# Allegro board AAP-PCB-SET6.brd
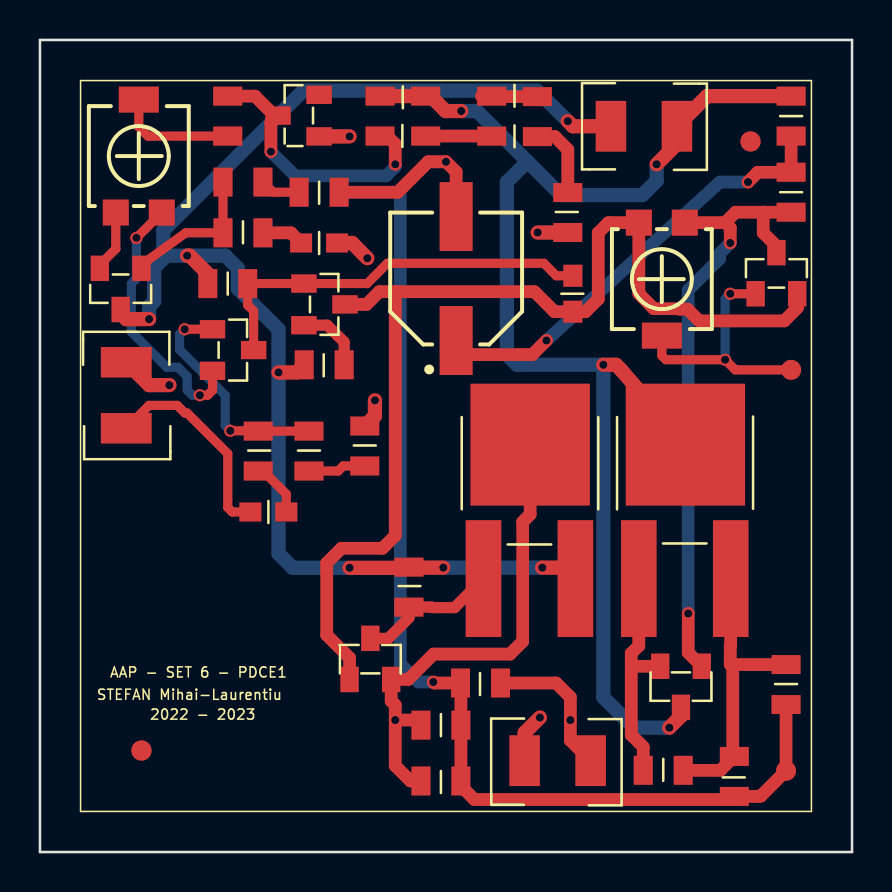
[diagram p0: board, top side]
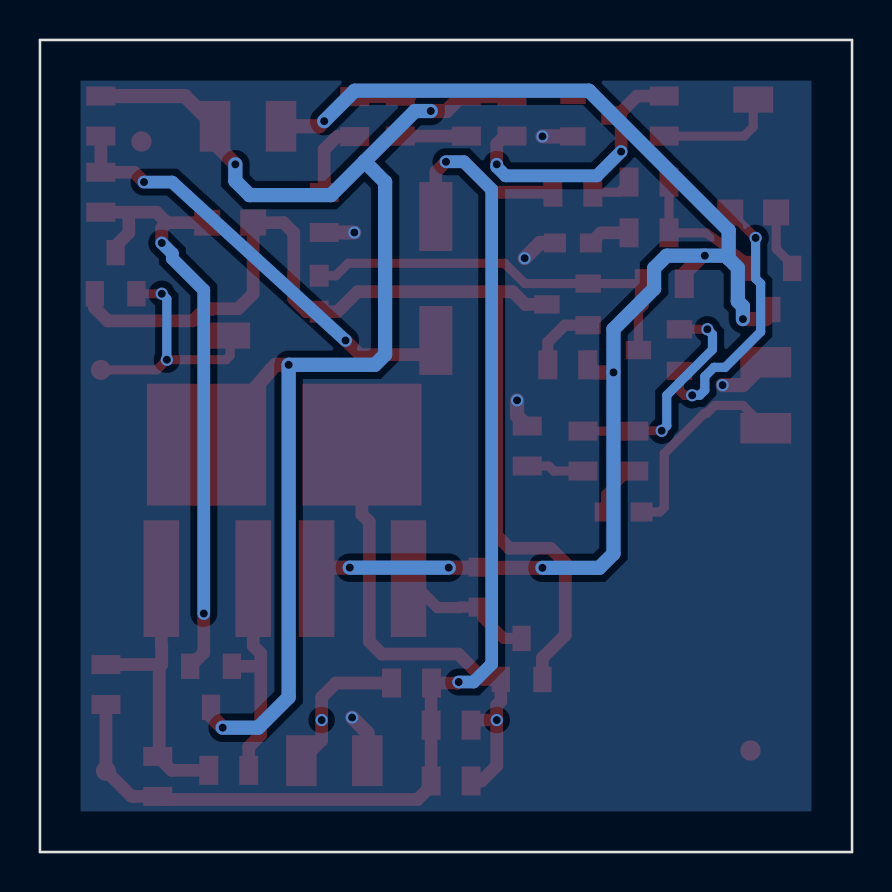
[diagram p1: board, bottom side, seen from below]

Outline 40.64 x 40.64 mm; copper layers: TOP, BOTTOM. Coordinates in mm from the lower left corner of the outline.
Outline path: 0,40.64 40.64,40.64 40.64,0 0,0 0,40.64

## Design rules (mm)
nets with their own width: min track width 0.457; nets N17839 N18413 N18419 N18433 N18443 N18567 N18575 N18713 N20372 N20376 SIGNAL-IN
nets with their own width: min track width 0.559; nets N18985 N19025
nets with their own width: min track width 0.635; nets N17849 N17953 N18017 N18083 N18151 N18611 N18637 N18835 N24736 N25913 N26075 N26146 SIGNAL-OUT
nets with their own width: min track width 0.711; nets +27V -27V GND

## Placement (name value [footprint] x y rotation side)
C1  4.7u  [CAPC2008X126N_0805]  11.43 17.02 0 top
C2  4.7u  [CAPC2008X126N_0805]  13.97 30.48 0 top
C3  10u  [CAPAE660X770N]  20.83 28.7 90 top
C4  4.7p  [CAPC2008X126N_0805]  26.67 27.94 270 top
D1  BZX84-C10  [TO236AB]  13.97 35.81 0 top
D2  LED  [RES2012X50N_0805]  26.42 32 270 top
IN  -  [unnamed#2]  4.32 22.86 90 top
J4  CON1  [TP100]  37.59 24.13 90 top
J5  CON1  [TP100]  37.34 4.06 270 top
NOREF  Value  [unnamed]  5.08 5.08 0 top
NOREF#2  Value  [unnamed]  35.56 35.56 0 top
OUT  -  [unnamed#2]  25.91 4.57 180 top
Q1  QBC856B  [TO236AB]  8.64 26.16 180 top
Q2  QBC856B  [TO236AB]  5.08 29.21 90 top
Q3  QBC817-25  [TO236AB]  13.21 28.45 180 top
Q4  QBC846B  [TO236AB]  35.81 27.94 270 top
Q5  QBC817-25  [TO236AB]  33.12 9.3 90 top
Q6  QBC807-25  [TO236AB]  15.49 8.64 270 top
Q7  QMJD31C  [TO252AA]  29.97 13.72 0 top
Q8  QMJD31C  [TO252AA]  22.2 13.72 0 top
R1  4.7  [RES2012X50N_0805]  10.92 20.07 90 top
R7  3.3k  [RES2012X50N_0805]  17.02 36.83 90 top
R8  15k  [RES2012X50N_0805]  9.4 36.83 90 top
R9  500  [TS53YL]  6.1 32 270 top
R10  3.3k  [RES2012X50N_0805]  10.16 30.99 0 top
R11  5.6k  [RES2012X50N_0805]  9.4 28.45 180 top
R12  330  [RES2012X50N_0805]  37.59 36.83 270 top
R13  3.3k  [RES2012X50N_0805]  37.59 33.02 270 top
R14  5k  [TS53YL]  29.97 31.5 90 top
R15  33  [RES2012X50N_0805]  14.22 24.38 180 top
R26  0.47  [RES2012X50N_0805]  31.19 4.09 0 top
R27  0.47  [RES2012X50N_0805]  18.47 13.26 90 top
R30  4.7  [RES2012X50N_0805]  22.05 8.46 0 top
R31  8.2k  [RES2012X50N_0805]  10.16 33.53 0 top
R32  22k  [RES2012X50N_0805]  13.97 33.02 0 top
R61  8.2k  [RES2012X50N_0805]  13.46 20.07 270 top
R62  22k  [RES2012X50N_0805]  16.26 20.32 90 top
R71  1k  [RES2012X50N_0805]  19.3 36.83 90 top
R72  220  [RES2012X50N_0805]  22.61 36.83 90 top
R73  33  [RES2012X50N_0805]  24.89 36.8 270 top
R281  1  [RES2012X50N_0805]  34.75 3.78 270 top
R282  0.47  [RES2012X50N_0805]  37.34 8.38 270 top
R291  1  [RES2012X50N_0805]  20.07 3.56 180 top
R292  0.47  [RES2012X50N_0805]  20.07 6.35 180 top
UNK+27V  -  [unnamed#2]  30.23 36.32 0 top

## Library data of the parts
C1 C2 C4 = CAP
C3 = CAPACITOR POL/SM_0
D1 = TCR22-2/TO_0
D2 = LED
J4 J5 = CON1
Q1 = PNP BCE_3
Q2 = PNP BCE_1
Q3 = NPN BCE_0
Q4 = NPN BCE_1
Q5 = NPN BCE_2
Q6 = PNP BCE_2
Q7 = NPN BCE_4
Q8 = NPN BCE_6
R1 R7 R8 R10-R13 R15 R26 R27 R30-R32 R61 R62 R281 R282 R291 R292 = R
R9 R14 = POT
R71-R73 = RESISTOR

## Footprints (pads in the part's own frame, mm; a bottom-side part is the same pattern mirrored in y, then rotated)
CAPAE660X770N
  rect 3.45x1.65 smd: 1(-3.1,0) 2(3.1,0)
CAPC2008X126N_0805
  rect 1.1x0.95 smd: 1(-0.9,0) 2(0.9,0)
RES2012X50N_0805
  rect 0.95x1.45 smd: 1(-1,0) 2(1,0)
TO236AB
  rect 1.27x0.914 smd: 1(0,0) 2(0,2.083) 3(-2.057,1.041)
TO252AA
  rect 1.778x5.842 smd: 1(-0.004,-0.034) 3(4.596,-0.034)
  rect 5.969x6.096 smd: 2(2.332,6.673)
TP100
  round 1 smd: 1(0,0)
TS53YL
  rect 1.3x1.3 smd: 1(0,0) 3(0,-2.3)
  rect 1.3x2 smd: 2(-5.65,-1.15)
unnamed
  round 1.016 smd: 1(0,0)
unnamed#2
  rect 1.524x2.54 smd: 1(-1.651,0) 2(1.651,0)

## Nets
+27V: Q5.3 Q7.2 R7.2 R12.1 R71.2 UNK+27V.2
-27V: Q2.3 Q8.3(E) R11.2 R15.2 R27.2 UNK+27V.1
GND: C2.2 D1.1 D2.2(CATHODE) IN.2 OUT.2 R62.2
SIGNAL-IN: C1.1 IN.1
SIGNAL-OUT: OUT.1 R30.2
N17839: R8.1 R9.2(WIPER)
N17849: D1.3 R7.1 R8.2
N17953: Q4.3 Q5.1 R13.2 R14.3
N18017: Q5.2(E) Q7.1 R26.1
N18083: C3.1 R12.2 R13.1
N18151: Q7.3(E) R26.2 R281.1 R282.1
N18413: C1.2 R1.1
N18419: Q1.1 R1.2 R61.1
N18433: Q2.1 R10.1 R31.1
N18443: R31.2 R32.1
N18567: C4.1 Q1.3 Q3.1 R11.1
N18575: J4.1 Q4.1 R14.2(WIPER)
N18611: C4.2 Q3.3 Q4.2(E) Q6.1 R14.1
N18637: C3.2(CATHODE) J5.1 R30.1 R32.2 R281.2 R282.2 R291.1 R292.1
N18713: R61.2 R62.1
N18835: Q6.2(E) Q8.2 R291.2 R292.2
N18985: Q6.3 Q8.1 R27.1
N19025: Q3.2(E) R15.1
N20372: Q2.2(E) R9.3
N20376: Q1.2(E) R9.1
N24736: C2.1 R10.2
N25913: R72.2 R73.1
N26075: D2.1 R73.2
N26146: R71.1 R72.1

Pads without a net: D1 2; NOREF 1; NOREF#2 1

## Via types
v1: diameter 0.61, hole 0.406, TOP to BOTTOM, 33 vias

## Routing (per net, layer and track width the routed paths; a pad name or vN(x,y) marks a point on that pad's centre or on a via; arc(x,y) is an arc through that point)
+27V: length 68.6
  TOP w0.711: v1(30.86,34.42) 31.88,35.43 UNK+27V.2 33.38,37.83 R12.1 ; Q5.3 32.08,6.81 v1(31.5,6.22) ; v1(21.08,37.08) 20.3,37.08 19.55,37.83 R71.2 R7.2 ; Q7.2 29.08,24.13 28.83,24.38 v1(28.19,24.38)
  BOTTOM w0.711: 24.4,34.56 21.87,37.08 v1(21.08,37.08) ; 24.4,34.56 26.08,32.88 30.15,32.88 30.86,33.59 v1(30.86,34.42) ; 24.4,34.56 23.37,33.53 23.37,24.89 23.88,24.38 v1(28.19,24.38) 28.19,7.75 29.72,6.22 v1(31.5,6.22)
-27V: length 70.5
  TOP w0.711: UNK+27V.1 26.67,36.32 v1(26.42,36.58) ; 8.38,28.43 R11.2 8.4,28.94 7.49,29.84 v1(7.37,29.84) ; v1(5.46,26.67) 4.32,26.67 4.04,26.95 Q2.3 ; Q8.3 26.24,14.23 v1(25.14,14.23) ; v1(20.18,14.23) 18.49,14.23 R27.2 18.43,14.22 v1(15.49,14.22) ; R15.2 12.84,24 v1(11.94,24)
  BOTTOM w0.711: v1(26.42,36.58) 24.89,38.1 13.17,38.1 6.17,31.1 6.17,29.69 ; 6.17,29.69 6.32,29.84 v1(7.37,29.84) 9.28,29.84 9.91,29.21 9.91,28.19 11.94,26.16 v1(11.94,24) 11.94,14.94 12.65,14.22 v1(15.49,14.22) ; 6.17,29.69 5.71,29.24 5.71,27.56 5.46,27.3 v1(5.46,26.67) ; v1(25.14,14.23) v1(20.18,14.23)
GND: length 11.5
  TOP w0.711: OUT.2 24.26,5.97 v1(25.02,6.73) ; v1(16.76,22.61) 16.76,21.83 R62.2 ; D2.2 v1(24.91,31) ; v1(6.48,23.37) 5.46,23.37 IN.2 ; v1(16.38,29.72) 15.62,30.48 C2.2 ; D1.1 v1(15.49,35.81)
SIGNAL-IN: length 10.5
  TOP w0.457: C1.1 9.62,17.02 9.4,17.24 9.4,19.94 7.37,21.97 7.25,21.97 6.87,22.35 5.46,22.35 IN.1
SIGNAL-OUT: length 7.4
  TOP w0.635: R30.2 25.83,8.46 26.54,7.75 v1(26.54,6.6) 26.54,5.59 OUT.1
N17839: length 6
  TOP w0.457: R9.2 4.95,36.29 5.4,35.83 R8.1
N17849: length 13.8
  TOP w0.635: R8.2 10.76,37.83 11.73,36.86 D1.3 11.56,36.5 v1(11.56,35.05) ; v1(17.78,34.42) 17.78,35.43 17.38,35.83 R7.1
  BOTTOM w0.635: v1(11.56,35.05) 12.77,33.84 17.33,33.84 17.78,34.29 v1(17.78,34.42)
N17953: length 31.3
  TOP w0.635: R13.2 36.2,32.02 ; 36.2,32.02 34.81,32.02 34.29,31.5 ; 36.2,32.02 36.2,30.99 36.86,30.33 Q4.3 ; 34.29,31.5 R14.3 ; 34.29,31.5 34.54,31.24 v1(34.54,30.48) ; Q5.1 32.44,9.98 v1(32.44,11.94)
  BOTTOM w0.635: v1(32.44,11.94) 32.44,28.12 34.01,29.7 34.01,29.95 v1(34.54,30.48)
N18017: length 11.5
  TOP w0.635: 29.59,9.27 29.59,5.86 30.19,5.26 R26.1 ; 29.59,9.27 29.62,9.3 Q5.2 ; 29.59,9.27 29.59,9.94 29.97,10.32 Q7.1
N18083: length 22.4
  TOP w0.635: R12.2 R13.1 35.92,34.02 v1(35.43,33.53) ; v1(25.35,25.6) 24.64,24.89 21.54,24.89 C3.1
  BOTTOM w0.635: v1(25.35,25.6) 34.02,33.53 v1(35.43,33.53)
N18151: length 14.6
  TOP w0.635: R282.1 34.56,9.38 ; 34.56,9.38 34.67,9.27 34.67,4.86 R281.1 34.05,4.09 R26.2 ; 34.56,9.38 34.54,9.4 34.54,10.29 34.57,10.32 Q7.3
N18413: length 2.8
  TOP w0.457: R1.1 11.17,19.07 12.33,17.91 C1.2
N18419: length 11.6
  TOP w0.457: R61.1 R1.2 10.91,21.08 v1(9.53,21.08) ; v1(7.24,26.16) Q1.1
  BOTTOM w0.457: v1(9.53,21.08) 9.27,21.34 9.27,22.86 6.99,25.15 6.99,25.91 v1(7.24,26.16)
N18433: length 7.3
  TOP w0.457: R31.1 R10.1 7.29,30.99 5.08,29.39 Q2.1
N18443: length 2
  TOP w0.457: R32.1 11.67,33.02 R31.2
N18567: length 20.4
  TOP w0.457: C4.1 25.84,28.84 25.22,29.46 17.39,29.46 16.37,28.45 Q3.1 R11.1 10.4,27.37 10.69,27.07 Q1.3
N18575: length 12.4
  TOP w0.457: R14.2 31.12,24.84 31.32,24.64 v1(34.29,24.64) 34.8,24.13 J4.1 ; v1(34.54,27.94) Q4.1
  BOTTOM w0.457: v1(34.29,24.64) 34.29,27.69 v1(34.54,27.94)
N18611: length 54.7
  TOP w0.635: Q6.1 15.49,9.72 14.35,10.86 14.35,14.46 15.09,15.2 17.14,15.2 17.78,15.84 17.78,28.04 ; 17.78,28.04 16.98,28.04 16.34,27.41 Q3.3 ; 17.78,28.04 24.75,28.04 25.75,27.04 C4.2 27.3,27.04 27.94,27.68 27.94,30.99 28.45,31.5 R14.1 29.97,27.94 30.72,27.19 31.99,27.19 32.01,27.17 32.4,27.17 32.99,26.58 37.25,26.58 37.91,27.24 37.91,27.93 Q4.2
N18637: length 64.6
  TOP w0.635: R32.2 17.91,33.02 19.43,34.54 v1(20.32,34.54) 20.83,34.04 C3.2 ; v1(19.68,8.51) 19.74,8.46 R30.1 21.07,8.44 R292.1 R291.1 21.07,3.31 21.74,2.63 34.59,2.63 R281.2 35.92,2.78 35.93,2.79 36.07,2.79 J5.1 R282.2
  BOTTOM w0.635: v1(20.32,34.54) 19.42,34.54 18.03,33.16 18.03,9.41 18.94,8.51 v1(19.68,8.51)
N18713: length 2.9
  TOP w0.457: R61.2 14.92,19.07 15.18,19.32 R62.1
N18835: length 24.8
  TOP w0.635: v1(17.78,6.6) 18.81,6.6 R292.2 ; v1(17.78,6.6) 17.78,4.32 18.54,3.56 R291.2 ; v1(17.78,6.6) 17.78,7.35 17.58,7.56 Q6.2 18.43,8.64 19.7,9.91 23.52,9.91 24.16,10.54 24.16,16.52 24.53,16.9 Q8.2
N18985: length 7.2
  TOP w0.559: Q6.3 17.43,10.69 18.47,11.73 R27.1 19.6,12.26 19.62,12.23 20.75,12.23 Q8.1
N19025: length 3.5
  TOP w0.559: Q3.2 14.37,26.37 15.22,25.52 R15.1
N20372: length 3.1
  TOP w0.457: R9.3 3.8,30.19 3,29.39 Q2.2
N20376: length 13.5
  TOP w0.457: Q1.2 8.64,23.11 8.38,22.86 v1(8,22.86) ; R9.1 v1(4.83,30.73)
  BOTTOM w0.457: v1(4.83,30.73) 4.83,28.7 4.57,28.45 4.57,26.04 6.35,24.26 6.91,24.26 7.37,23.8 7.37,23.11 7.62,22.86 v1(8,22.86)
N24736: length 2.1
  TOP w0.635: R10.2 12.56,30.99 C2.1
N25913: length 2.8
  TOP w0.635: 22.1,37.83 R72.2 22.63,37.8 R73.1
N26075: length 3.9
  TOP w0.635: R73.2 25.77,35.8 26.42,35.16 D2.1
N26146: length 3.3
  TOP w0.635: R71.1 R72.1

## Copper pours and planes (outline as drawn; the poured copper is in the pictures)
GND on BOTTOM: 2.03,2.03 2.03,38.61 38.61,38.61 38.61,2.03

## Text on the board
Ref Des/Silkscreen Top: STEFAN Mihai-Laurentiu | AAP - SET 6 - PDCE1 | 2022 - 2023
XSECTION_CHART: *  SURFACE | L1 TOP CONDUCTOR | *  DIELECTRIC | L2 BOTTOM CONDUCTOR | DESIGN CROSS SECTION CHART | ___________________________ | TOTAL THICKNESS 60 MIL | 1-2
PLACE_BOUND_TOP: FIGURE | FINISHED_SIZE | 16.0 | DRILL CHART: TOP to BOTTOM | ALL UNITS ARE IN MILS | PLATED | QTY | 33
